# Altium PCB MotionBoard.PcbDoc
Units mil, origin at the board's own origin, x right, y up, seen from the top; angles counter-clockwise.
Board outline 6000 x 4000 mil, 2 copper layers (Top Layer, Bottom Layer); 37 components, 26 nets, 129 pads, 0 vias.
Unrouted connection lines stored in the file: 88.
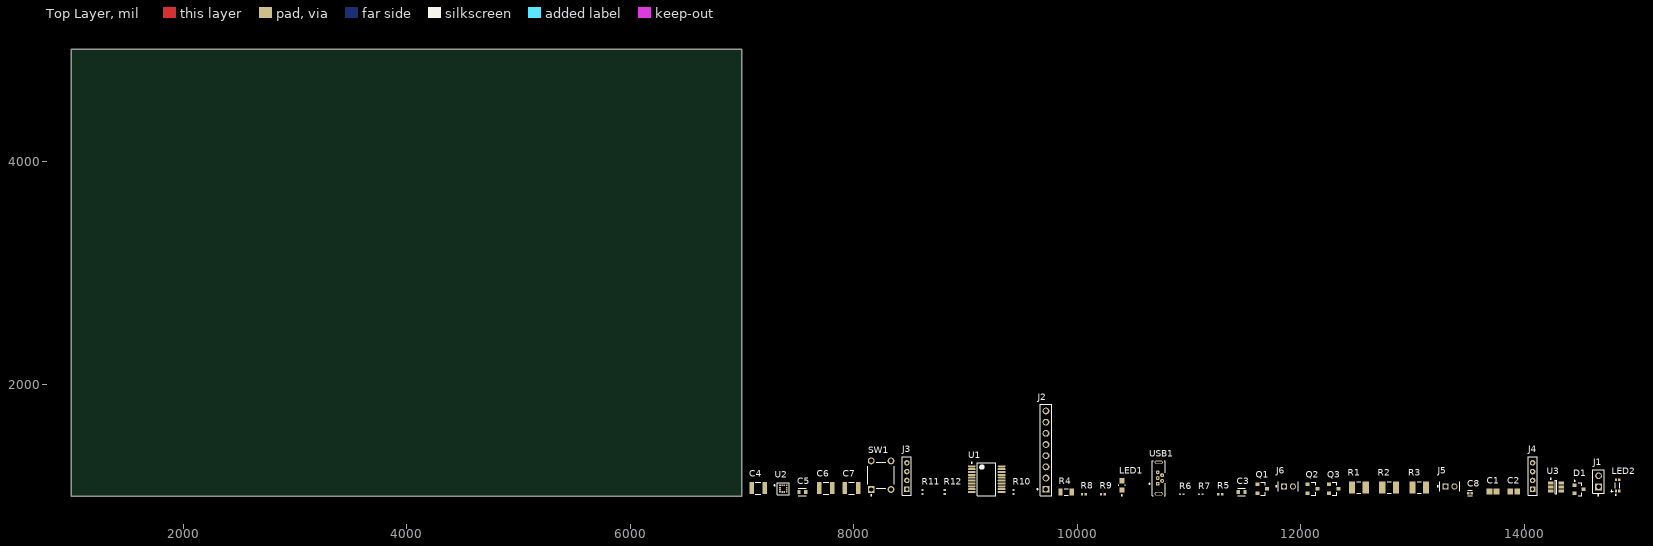
[diagram p0: Top Layer view]
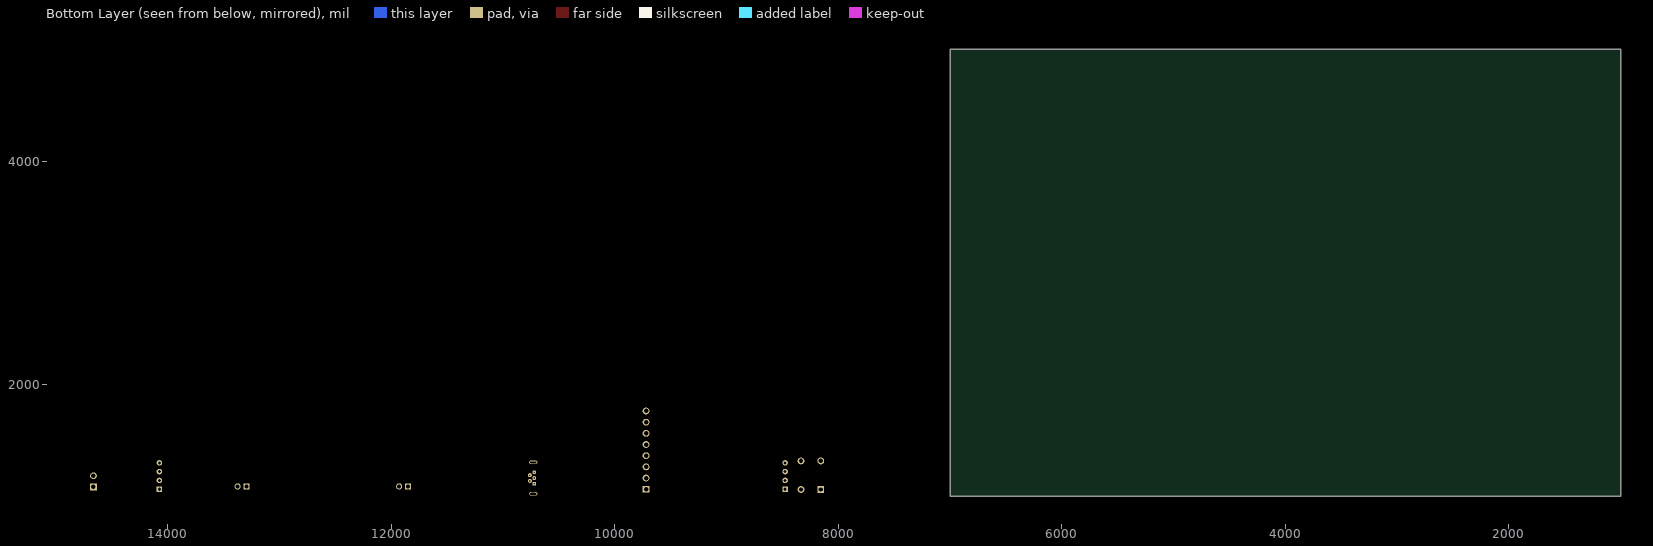
[diagram p1: Bottom Layer view, seen from below]

## Layer stack, top to bottom
Top Solder: solder mask 0.4, Solder Resist, Dk 3.5
Top Layer: signal copper 1.4
Dielectric 1: dielectric 12.6, FR-4, Dk 4.8
Bottom Layer: signal copper 1.4
Bottom Solder: solder mask 0.4, Solder Resist, Dk 3.5

## Board outline
1000,1000 7000,1000 7000,5000 1000,5000

## Design rules (kind name [scope] priority, off if disabled: settings)
Clearance [All] p1: gap=10 ignorepadtopadclearanceinfootprint=FALSE
PolygonConnect [All] p1: connectstyle=Relief reliefconductorwidth=10 reliefentries=4 polygonreliefangle="90 Angle" airgapwidth=10
RoutingVias [All] p1: holewidth=28 width=50 viastyle="Through Hole" minholewidth=28 minwidth=50 maxholewidth=28 maxwidth=50
SolderMaskExpansion [All] p1: expansion=4 istentingtop=FALSE
SupplyNets "Schematic Supply Nets_4" [InNet('+3V3')] p1: voltage=0.000
SupplyNets "Schematic Supply Nets_3" [InNet('GND')] p2: voltage=0.000
SupplyNets "Schematic Supply Nets_2" [InNet('+5V_USB')] p3: voltage=0.000
SupplyNets "Schematic Supply Nets_1" [InNet('VIN')] p4: voltage=0.000
SupplyNets "Schematic Supply Nets" [InNet('+VBAT')] p5: voltage=0.000
Width [All] p1: maxlimit=10 minlimit=10 preferedwidth=10
30 further rules are at their usual default settings.

## Components (designator, comment, footprint, x,y, rotation, side; value= is the part's Value field where it differs from the comment)
C1 "1u" CAPC2013X140X50NL20T25 13720,1045 r0 top
C2 "1u" CAPC2013X140X50NL20T25 13905,1045 r0 top
C3 "10u" FP-GRM188-0_2-MFG 11470,1040 r0 top
C4 "100n" FP-AC1210-0_85-MFG 7145,1075 r0 top value="100 nF"
C5 "10u" FP-GRM188-0_2-MFG 7540,1040 r0 top
C6 "100n" FP-AC1210-0_85-MFG 7750,1075 r0 top value="100 nF"
C7 "100n" FP-AC1210-0_85-MFG 7980,1075 r0 top value="100 nF"
C8 "470p" FP-C0402-BB-MFG 13515,1030 r0 top value="470 pF"
D1 "SBAT54CLT1G" ONSC-SOT-23-3-318-08_V 14490,1065 r0 top
J1 "TLW-102-07-G-S-230" FP-MTLW-102-07-G-S-230-MFG 14665,1135 r90 top
J2 "PPPC081LFBN-RC" SLIN-PPPC081LFBN-RC_V 9720,1415 r90 top
J3 "MMS-104-01-L-SV" SMTC-MMS-104-01-X-SV 8475,1065 r90 top
J4 "MMS-104-01-L-SV" SMTC-MMS-104-01-X-SV 14075,1065 r90 top
J5 "TMM-102-03-L-S" FP-TMM-102-03-L-S-MFG 13335,1090 r0 top
J6 "TMM-102-03-L-S" FP-TMM-102-03-L-S-MFG 11890,1090 r0 top
LED1 "G_LED 0805" FP-LG_R971-MFG 10400,1100 r90 top
LED2 "OVSRRGBCC3TM" FP-OVSRRGBCC3TM-MFG 14835,1100 r0 top
Q1 "2N7002" FP-PG-SOT23-3-MFG 11655,1070 r0 top
Q2 "2N7002" FP-PG-SOT23-3-MFG 12105,1070 r0 top
Q3 "2N7002" FP-PG-SOT23-3-MFG 12295,1070 r0 top
R1 "200" RESC3225X60X45ML20T20 12520,1080 r0 top
R2 "200" RESC3225X60X45ML20T20 12790,1080 r0 top
R3 "200" RESC3225X60X45ML20T20 13060,1080 r0 top
R4 "0 Ohm" RESC3116X65X45LL15T20 9900,1040 r0 top
R5 "10k" RESC1005X40X20NL05T10 11280,1020 r0 top
R6 "5.1k" RESC1005X35X20LL05T10 10935,1020 r0 top
R7 "5.1k" RESC1005X35X20LL05T10 11105,1020 r0 top
R8 "10k" RESC1005X40X20NL05T10 10060,1020 r0 top
R9 "10k" RESC1005X40X20NL05T10 10230,1020 r0 top
R10 "10k" RESC1005X40X20NL05T10 9430,1040 r90 top
R11 "10k" RESC1005X40X20NL05T10 8615,1040 r90 top
R12 "10k" RESC1005X40X20NL05T10 8815,1040 r90 top
SW1 "MJTP1230A" FP-MJTP1230A-MFG 8245,1190 r90 top
U1 "PIC16LF1829-I/SS" MCHP-SSOP-SS20_L 9190,1155 r0 top
U2 "IIS2DHTR" FP-LGA-12-8365767-MFG 7370,1070 r0 top
U3 "TC1073-3.3VCH713" SOT-23-CH6_M 14285,1085 r0 top
USB1 "USB3105-30-A" GCT-USB3105-30-A_V 10740,1165 r90 top

## Footprints (in the part's own frame and the unit in brackets; to place one, negate y for a bottom-side part, rotate by r counter-clockwise, add the part's x,y. Pads: shape width x height; smd on the part's side, far side on the other; paste and mask are expansions set on the pad)
CAPC2013X140X50NL20T25 [mm] "Chip Capacitor, 2-Leads, Body 2.00x1.25mm, IPC Medium Density"
  rect 1.3x1.45 smd: 1(-0.8,0) 2(0.8,0)
  body extent -1.1,-0.72 1.1,0.72, height 1.4
FP-AC1210-0_85-MFG [mm]
  rect 1x2.7 smd paste+0 mask+0: 1(-1.5,0) 2(1.5,0)
  silkscreen extent -0.63,-1.35 0.63,1.35, body extent -2.2,-1.7 2.2,1.7, height 0.25
FP-C0402-BB-MFG [mm]
  rect 0.52x0.52 smd paste+0 mask+0: 1(-0.4,0) 2(0.4,0)
  silkscreen extent -0.5,-0.64 0.5,0.64, body extent -0.8,-0.4 0.8,0.4, height 0.25
FP-GRM188-0_2-MFG [mm]
  rect 0.75x0.9 smd paste+0 mask+0: 1(-0.775,0) 2(0.775,0)
  silkscreen extent -0.9,-0.9 0.9,0.9, body extent -1.25,-0.6 1.25,0.6, height 0.25
FP-LG_R971-MFG [mm]
  rect 1.2x1.2 smd paste+0 mask+0: 1(-1.05,0) 2(1.05,0)
  silkscreen extent -2.4,-0.7 0.08,0.7, body extent -1.75,-0.8 1.75,0.8, height 0.25
FP-LGA-12-8365767-MFG [mm]
  rect 0.375x0.35 smd paste+0 mask+0: 1(-0.763,0.75) 2(-0.763,0.25) 3(-0.763,-0.25) 4(-0.763,-0.75) 7(0.763,-0.75) 8(0.763,-0.25) 9(0.763,0.25) 10(0.763,0.75)
  rect 0.35x0.375 smd paste+0 mask+0: 5(-0.25,-0.763) 6(0.25,-0.763) 11(0.25,0.763) 12(-0.25,0.763)
  silkscreen extent -2.12,-1.38 1.38,1.38, body extent -1.58,-1.58 1.58,1.58, height 0.25
FP-MJTP1230A-MFG [mm]
  rect 1.55x1.55 hole 1 paste-2539.97 mask+0: 1(-3.25,2.25)
  round 1.55 hole 1 paste-2539.97 mask+0: 2(3.25,2.25) 3(-3.25,-2.25) 4(3.25,-2.25)
  silkscreen extent -4.7,-3 3,3, body extent -4.13,-3.13 4.13,3.13, height 0.25
FP-MTLW-102-07-G-S-230-MFG [mm]
  rect 1.52x1.52 hole 1.02 paste-2539.97 mask+0: 1(-1.27,0)
  round 1.52 hole 1.02 paste-2539.97 mask+0: 2(1.27,0)
  silkscreen extent -3.27,-1.31 2.67,1.31, body extent -2.77,-1.41 2.77,1.41, height 0.25
FP-OVSRRGBCC3TM-MFG [mm]
  rect 0.5x0.6 smd paste+0 mask+0: 1(0.375,-1.3) 2(0.375,1.3) 3(-0.375,1.3) 4(-0.375,-1.3)
  silkscreen extent -1.53,-2.3 0.5,0.63, body extent -0.72,-1.7 0.72,1.7, height 0.25
FP-PG-SOT23-3-MFG [mm]
  rect 0.9x0.8 smd paste+0 mask+0: 1(-1.1,1) 2(-1.1,-1) 3(1.1,0)
  silkscreen extent -0.28,-1.5 0.7,1.5, body extent -1.65,-1.6 1.65,1.6, height 0.25
FP-TMM-102-03-L-S-MFG [mm]
  rect 1.39x1.39 hole 0.89 paste-2539.97 mask+0: 1(-1,0)
  round 1.39 hole 0.89 paste-2539.97 mask+0: 2(1,0)
  silkscreen extent -2.9,-1.05 2.27,1.05, body extent -2.1,-2.07 2.1,2.07, height 0.25
GCT-USB3105-30-A_V [mm] "THD, 5-Leads, Body 7.96x2.9mm, Pitch 0.65mm"
  rect 0.9x0.9 hole 0.4: 1(-1.3,0.5)
  round 0.9 hole 0.4: 2(-0.65,-0.5) 3(0,0.5) 4(0.65,-0.5) 5(1.3,0.5)
  oval 0.85x1.85 hole 0.35 slot 1.35 at 90 deg: 6(-3.575,0.28) 7(3.575,0.28)
  silkscreen extent -3.98,-1.17 3.98,2.5, body extent -3.98,-1.18 3.98,1.75, height 5.61
MCHP-SSOP-SS20_L [mm] "SOP, 20-Leads, Body 7.2x5.3mm, Pitch 0.65mm, IPC High Density"
  oval 1.8x0.45 smd: 1(-3.4,2.925) 2(-3.4,2.275) 3(-3.4,1.625) 4(-3.4,0.975) 5(-3.4,0.325) 6(-3.4,-0.325) 7(-3.4,-0.975) 8(-3.4,-1.625) 9(-3.4,-2.275) 10(-3.4,-2.925) 11(3.4,-2.925) 12(3.4,-2.275) 13(3.4,-1.625) 14(3.4,-0.975) 15(3.4,-0.325) 16(3.4,0.325) 17(3.4,0.975) 18(3.4,1.625) 19(3.4,2.275) 20(3.4,2.925)
  silkscreen extent -3.52,-3.75 2.1,3.82, body extent -2.8,-3.75 2.8,3.75, height 2
ONSC-SOT-23-3-318-08_V [mm] "SOT23, 3-Leads, Body 2.92x1.3mm, Pitch 0.95mm"
  rect 0.9x0.8 smd: 1(-1,0.95) 2(-1,-0.95) 3(1,0)
  silkscreen extent -1.12,-1.46 0.65,2.02, body extent -0.65,-1.46 0.65,1.46, height 1.11
RESC1005X35X20LL05T10 [mm] "Chip Resistor, 2-Leads, Body 1.00x0.50mm, IPC High Density"
  rect 0.45x0.45 smd: 1(-0.4,0) 2(0.4,0)
  body extent -0.53,-0.27 0.53,0.28, height 0.35
RESC1005X40X20NL05T10 [mm] "Chip Resistor, 2-Leads, Body 1.00x0.50mm, IPC Medium Density"
  rect 0.55x0.55 smd: 1(-0.45,0) 2(0.45,0)
  body extent -0.53,-0.27 0.53,0.28, height 0.4
RESC3116X65X45LL15T20 [mm] "Chip Resistor, 2-Leads, Body 3.25x1.7mm, IPC High Density"
  rect 0.95x1.6 smd: 1(-1.3,0) 2(1.3,0)
  silkscreen extent -0.45,-0.7 0.45,0.7, body extent -1.63,-0.85 1.63,0.85, height 0.65
RESC3225X60X45ML20T20 [mm] "Chip Resistor, 2-Leads, Body 3.20x2.50mm, IPC Low Density"
  rect 1.4x2.8 smd: 1(-1.55,0) 2(1.55,0)
  silkscreen extent -0.45,-1.3 0.45,1.3, body extent -1.7,-1.35 1.7,1.35, height 0.6
SLIN-PPPC081LFBN-RC_V [mm] "THD, 8-Leads, Body 20.82x2.54mm, Pitch 2.54mm"
  rect 1.55x1.55 hole 1.02: 1(-8.89,0)
  round 1.55 hole 1.02: 2(-6.35,0) 3(-3.81,0) 4(-1.27,0) 5(1.27,0) 6(3.81,0) 7(6.35,0) 8(8.89,0)
  silkscreen extent -10.41,-1.27 10.41,2.04, body extent -10.41,-1.27 10.41,1.27, height 8.5
SMTC-MMS-104-01-X-SV [mm] "Through Hole Box Connector Strip Assembly, 1x4 Pins, Vertical, 2mm Pitch, Female"
  rect 1.25x1.25 hole 0.711: 1(0,0)
  round 1.25 hole 0.711: 2(2,0) 3(4,0) 4(6,0)
  silkscreen extent -1.35,-1.03 7.34,1.03, body extent -1.28,-1 7.28,1, height 4.44
SOT-23-CH6_M [mm] "SOT23, 6-Leads, Body 2.9x1.7mm, Pitch 0.95mm, Lead Span 2.8mm, IPC Low Density"
  rect 1.3x0.7 smd: 1(-1.2,0.95) 2(-1.2,0) 3(-1.2,-0.95) 4(1.2,-0.95) 5(1.2,0) 6(1.2,0.95)
  silkscreen extent -1.32,-1.55 0.15,1.97, body extent -0.9,-1.55 0.9,1.55, height 1.45

## Part data
C1 C2: library part CMP-2007-03237-1, Manufacturer=Kemet, Part Number=C0805C105M4PACTU
C3 C5: library part CMP-06035-009669-1, "Chip Multilayer Ceramic Capacitors for General Purpose, 0603, 10uF, X5R, 15%, 20%, 16V / GRM188R61C106MA73J", Capacitance=10uF, Dielectric=X5R, Tolerance=20%, Voltage Rating (DC)=16V, Length=1.6mm, Thickness=800um, Width=800um
C4 C6 C7: library part CMP-03422-000642-1, "CAP CER 0.1UF 100V X7R 1210 / AC1210KKX7R0BB104", Capacitance="100 nF", Manufacturer=Yageo, Manufacturer Part Number=AC1210KKX7R0BB104, Package=AC1210-0.85, Temperature="-55°C to +125°C", Temperature Characteristic=X7R, Temperature Coefficient=15%, Temperature Range High=+125°C, Temperature Range Low=-55°C, Tolerance=0.1, Voltage Rating="100 V", Automotive=Yes, Automotive Grade="Grade 1", Category=Cap, ComponentLink2Description=Datasheet, ComponentLink2URL=http://www.yageo.com/documents/recent/UPY-AC_NP0X7R_16V-to-630V_12.pdf, Device Class L1="Passive Components", Device Class L2=Capacitors, Device Class L3="Ceramic Capacitors", Digikey Description="CAP CER 0.1UF 100V X7R 1210", Footprint Url=http://www.yageo.com/exep/pages/download/literatures/UPY-C_GEN_24.pdf, Height=0.95mm, Ipc Land Pattern Name=CAPC320250X85, Lead Free=Yes, Material=Ceramic, Octopart=https://octopart.com/ac1210kkx7r0bb104-yageo-78873719, RoHS=TRUE
C8: library part CMP-03020-005716-2, "C0402 470 pF C0G 10.00% 16 V", Capacitance="470 pF", Manufacturer=Kemet, Manufacturer Part Number=C0402C471K4GACAUTO, Package=C0402-BB, Temperature="-55°C to +125°C", Temperature Characteristic=C0G, Temperature Coefficient=15%, Temperature Range High=+125°C, Temperature Range Low=-55°C, Tolerance=0.1, Voltage Rating="16 V", Automotive=No, Category=Cap, ComponentLink2Description=Datasheet, ComponentLink2URL=https://content.kemet.com/datasheets/KEM_C1002_X7R_SMD.pdf, Device Class L1="Passive Components", Device Class L2=Capacitors, Device Class L3="Ceramic Capacitors", Height=0.55mm, Ipc Land Pattern Name=CAPC10050X50, Lead Free=Yes, Material=Ceramic, Octopart=https://octopart.com/c0402c471k4gacauto-kemet-48652786, RoHS=TRUE
D1: library part CMP-1055-00546-1, "Dual Common Cathode Schottky Barrier Diodes, 3-Pin SOT-23, Pb-Free, Tape and Reel", Manufacturer="On Semiconductor", ComponentLink1Description="Manufacturer URL", ComponentLink1URL=http://www.onsemi.com/, ComponentLink2Description=Datasheet, ComponentLink2URL=http://www.onsemi.cn/pub_link/Collateral/BAT54CLT1-D.PDF, ComponentLink3Description="Package Specification", ComponentLink3URL=http://www.onsemi.cn/pub_link/Collateral/318-08.PDF, Configuration="Common Cathode", DatasheetVersion="Rev. 8", IFSM Max (A)=0.6, Mounting Technology="Surface Mount", PackageDescription="3-Pin Small Outline Transistor, Body 2.92 x 1.3 mm, Pitch 0.95 mm", PackageReference=SOT-23-3-318-08, PackageVersion="Rev. AP, 11/2009", Packing="Tape and Reel", PartNumber=SBAT54CLT1G, RoHS=TRUE, trr Max (ns)=5
J1: library part CMP-02766-001053-1, "CONN HEADER VERT 2POS 2.54 / MMMTLW-102-07-G-S-230", Housing Color=Black, Max Current Rating=3A, Max Operating Temperature=125°C, Min Operating Temperature=-55°C, Contact Material=Bronze, Contact Plating=Gold, Depth=2.48mm, Gender=Male, Housing Material=Polymer, Length=5.08mm, Number of Contacts=2, Number of Rows=1, Orientation=Straight, Packaging=Bulk, Pitch=2.54mm, Radiation Hardening=No, Termination=Solder
J2: library part CMP-002-00028-2, "Female Header, Pitch 2.54 mm, 1 x 8 Position, Height 8.5 mm, Tail Length 3.2 mm, -40 to 105 degC, RoHS, Bulk", Manufacturer=Sullins, Max Operating Temperature=105°C, Min Operating Temperature=-40°C, Package Description="Female Header, Pitch 2.54 mm, 1 x 8 Position, Height 8.5 mm, Tail Length 3.2 mm", Case/Package=PPPC081LFBN-RC, Connector Type=Header, Datasheet URL=http://sullinscorp.com/catalogs/101_PAGE114-115_.100_FEMALE_HDR.pdf, Datasheet Version=Jan-15, Gender=Female, Mounting Technology=TH, Package Reference=PPPC081LFBN-RC, RoHS Compliant=Unknown
J3 J4: library part CMP-1022-00067-1, "Tiger Claw(TM) Socket Strip, Through-hole, Vertical, -55 to 125 degC, 2 mm Pitch, 4-Pin, Female, RoHS", Manufacturer=Samtec, Temperature Range="-55 to 125 degC", ComponentLink1Description="Manufacturer URL", ComponentLink1URL=http://www.samtec.com, ComponentLink2Description=Datasheet, ComponentLink2URL=http://www.samtec.com/documents/webfiles/pdf/MMS.PDF, ComponentLink3Description="Package Specification", ComponentLink3URL=http://www.samtec.com/documents/webfiles/cpdf/MMS-1XX-01-XXX-XX-XXX-MKT1.pdf, DatasheetVersion=F-214, Mounting Technology=Through-hole, Orientation=Vertical, PackageDescription="2mm Through Hole Box Connector Strip Assembly", PackageReference=MMS-104-01-X-SV, PackageVersion="AO, 2/1993", PartNumber=MMS-104-01-L-SV, Pitch="2 mm", RoHS=True
J5 J6: library part CMP-02766-001502-1, "CONN HEADER 2POS SNGL 2MM T/H", Color=Black, Max Current Rating=3.9A, Max Operating Temperature=125°C, Max Voltage Rating (AC)=500V, Min Operating Temperature=-55°C, Package Quantity=1, Connector Type=Header, Contact Finish - Mating=GOLD, Contact Material=Bronze, Contact Mating Length=0.157inch, Contact Plating=Gold, Contact Shape=Square, Contact Type="Male Pin", Depth=1.97mm, Fastening Type=Pull, Gender=Male, Housing Color=Black, Housing Material=Polymer, Insulation Color=Black, Insulation Material=Polymer, Lead Free="Lead Free", Length=4mm, Mount="Through Hole", Number of Contacts=2, Number of Positions=2, Number of Rows=1, Orientation=Straight, Packaging=Bulk, Pitch=2mm, Radiation Hardening=No, REACH SVHC="No SVHC", RoHS Compliant=Yes, Series=TMM, Termination=Solder
LED1: library part CMP-62016-000039-1, "LED GREEN DIFFUSED 0805 SMD / Q62702P5179", Case Code (Imperial)=0805, Case Code (Metric)=2012, Color=Green, Forward Current=25mA, Forward Voltage=2.2V, Lens Color=White, Max Operating Temperature=85°C, Min Operating Temperature=-30°C, Package Quantity=1, Power Dissipation=65mW, Reverse Voltage=12V, Test Current=20mA, Case/Package=0805, Depth=1.35mm, Dominant Wavelength=570nm, Height=0.9mm, Illumination Color=Green, Length=2.1mm, Lens Size=1.25mm, Lens Style=Diffused, Lens Transparency=Diffused, Luminous Flux=0.1lm, Luminous Intensity=45mcd, Mount="Surface Mount", Number of Elements=1, Number of LEDs=1, Number of Pins=2, Packaging="Tape and Reel", Radiation Hardening=No, Viewing Angle=160°, Width=1.25mm
LED2: library part CMP-70659-000001-1, "LED RGB DIFFUSED 1204 SMD", Case/Package=SMD/SMT, Color=Blue, Forward Voltage=3.3V, Lens Color=White, Test Current=20mA, Dominant Wavelength=475nm, Height=1.5mm, Lead Free="Lead Free", Length=3.2mm, Lens Style=Dome, Lens Transparency=Diffused, Luminous Intensity=200mcd, Mount="Surface Mount", Packaging="Cut Tape", REACH SVHC="No SVHC", RoHS Compliant=Yes, Series=-, Viewing Angle=150°, Width=1mm
Q1 Q2 Q3: library part CMP-32901-000180-1, "MOSFET N-CH 60V 0.3A SOT23 / 2N7002H6327XTSA2", Case/Package=SOT-23, Continuous Drain Current (ID)=300mA, Drain to Source Voltage (Vdss)=60V, Gate to Source Voltage (Vgs)=20V, Input Capacitance=20pF, Max Operating Temperature=150°C, Max Power Dissipation=500mW, Min Operating Temperature=-55°C, Halogen Free="Halogen Free", Lead Free="Lead Free", Max Dual Supply Voltage=60V, Mount="Surface Mount", Number of Pins=3, Packaging="Tape and Reel", Rds On Max=3R, Rise Time=3.3ns
R1 R2 R3: library part CMP-2005-00653-1, "CRCW1210200RJNTA", Manufacturer="Vishay Dale", Part Number=CRCW1210200RJNTA
R4: library part CMP-2000-07493-1, "Chip Resistor, 0 Ohm, +/- 0%, 0.25 W, -55 to 155 degC, 1206 (3216 Metric), RoHS, Tape and Reel / CRG1206ZR", Case Code (Imperial)=1206, Case Code (Metric)=3216, Manufacturer="TE Connectivity", Max Operating Temperature=125degC, Min Operating Temperature=-55degC, Number of Resistors=1, Package Description="2-Pin Chip Resistor, Body 3.1 x 1.55 mm", Package Quantity=5000, Package Reference=RESC3116X65X45L15T20, Power Rating=250mW, Resistance=0mOhm, Temperature Coefficient=100ppm\/degreesC, Tolerance=0%, Voltage Rating=200V, Case\/Package=1206, Composition=ThickFilm, Datasheet URL=http://www.te.com/commerce/DocumentDelivery/DDEController?Action=showdoc&DocId=Customer+Drawing%7F1623693%7FBA%7Fpdf%7FEnglish%7FENG_CD_1623693_BA.pdf%7F1623693-1, Datasheet Version="Rev. BA, 12/2009", Depth=1.55mm, ELV=Compliant, Height=0.55mm, Length=3.1mm, Manufacturer URL=http://www.te.com/, Mount=SurfaceMount, Mounting Technology=SurfaceMount, Number of Terminations=2, Packaging=TapeandReel, Radiation Hardening=No, RoHSCompliant=true, Termination=Solder, Weight=0.000571oz, Width=1.55mm
R5 R8 R9 R10 R11 R12: library part CMP-2002-01682-1, "TNPW040210K0DEED", Manufacturer="Vishay BCcomponents", Part Number=TNPW040210K0DEED
R6 R7: library part CMP-2002-03342-1, "CPF0402B5K1E1", Manufacturer="TE Connectivity / AMP", Part Number=CPF0402B5K1E1
SW1: library part CMP-47024-000004-1, "SWITCH TACTILE SPST-NO 0.05A 12V", Actuator Color=Black, Contact Resistance=100mR, Current Rating=50mA, Max Operating Temperature=70°C, Max Voltage Rating (DC)=12V, Min Operating Temperature=-20°C, Operating Force=160gf, Package Quantity=2000, Actuator Length=1.4mm, Actuator Material=Thermoplastic, Actuator Type=Standard, Color=Black, Contact Material=Bronze, Contact Plating=Silver, Electrical Life=100000Cycles, Illumination Type=Non-Illuminated, Mechanical Life=100000Cycles, Mount="Through Hole", Orientation=Straight, Packaging=Bulk, REACH SVHC="No SVHC", RoHS Compliant=Yes, Series=MJTP, Switch Function=Off-Mom, Switch Travel=0.25mm, Termination="PC Pin", Throw Configuration=SPST, Voltage Rating (DC)=12V
U1: library part CMP-0115-02781-1, "Flash Microcontroller with XLP Technology, 32 MHz, 17 I/O, -40 to 85 degC, 20-pin SSOP (SS20), Tube", Manufacturer=Microchip, Operation Voltage Range="1.8V - 3.6V", # of A/D Channels=12, ComponentLink1Description=Datasheet, ComponentLink1URL=http://ww1.microchip.com/downloads/en/DeviceDoc/41440C.pdf, ComponentLink2Description="Package Specification", ComponentLink2URL=http://www.microchip.com/stellent/groups/techpub_sg/documents/packagingspec/en012702.pdf, ComponentLink3Description="URL Link1", ComponentLink3URL="Product URL:http://www.microchip.com/wwwproducts/Devices.aspx?dDocName=en546919", DatasheetVersion="Rev. C", Digital Communication="1 -A/E/USART, 2 -MSSP(SPI/I2C)", EEPROM Data Memory (bytes)=256, I/O Pins=17, Internal Oscillator="32 MHz, 31 kHz", Max. CPU Speed MHz=32, Memory Type=Flash, Mounting Technology="Surface Mount", PackageDescription="20-Lead Plastic Shrink Small Outline, 5.3 x 7.2 mm Body, 0.65 mm Pitch", PackageReference=SSOP-SS20, PackageVersion="C04-072B, 12/2012", Packing=TUBE, PartNumber=PIC16LF1829-I/SS, Program Memory KBytes=14, Program Memory KWords=8, RAM=1024, Timers="4 - 8-bit, 1 - 16-bit, 0 - 32-bit"
U2: library part CMP-12175-000008-1, "ACCEL 2-16G I2C/SPI 12LGA", Manufacturer=STMicroelectronics, Max Supply Voltage=3.7V, Min Supply Voltage=1.71V, Operating Supply Current=2-11uA, Package=LGA-12-8365767, Temperature="-40°C to +85°C", Temperature Range High=+85°C, Temperature Range Low=-40°C, Accel Axis="X+Y and Z", Accel Range=2/4/8/16g, Automotive=No, Category=IC, ComponentLink2Description=Datasheet, ComponentLink2URL=https://www.st.com/content/ccc/resource/technical/document/datasheet/group1/35/6d/04/26/27/5c/4d/7c/DM00171283/files/DM00171283.pdf/jcr:content/translations/en.DM00171283.pdf, Device Class L1=Sensors, Device Class L2="Motion Sensors", Device Class L3=Accelerometers, Digikey Description="ACCEL 2-16G I2C/SPI 12LGA", Height=1mm, Lead Free=Yes, Manufacturer Part Number=IIS2DHTR, Octopart=https://octopart.com/iis2dhtr-stmicroelectronics-58218805, RoHS=TRUE, Sensor Output=I2C,SPI
U3: library part CMP-0136-00636-1, "50mA and 100mA CMOS LDOs with Shutdown, Active-Low Error Output and VREF Bypass, 6-Pin SOT-23, Extended Temperature, Tape and Reel", Code_IPC=SOT26A-6, DatasheetVersion="revD, Feb-2007", PackageDescription="6-Lead Plastic Small Outline Transistor (CH) [SOT-23]", PackageReference=SOT-23-CH6, PackageVersion="revBB, Aug-2009"
USB1: library part CMP-2000-07366-1, "USB 2.0 A/B Receptacle, 30 V, -55 to 85 degC, 5-Pin THD, RoHS, Tape and Reel", Manufacturer="Global Connector Technology", Package Description="5-Pin Through Hole Device, Body 7.96 x 2.9 mm, Pitch 0.65 mm", Connector Mounting=ThroughHoleMount, Contact Material=CopperAlloy, Contact Plating=GoldPlatedContacts, Datasheet URL=http://gct.co/usb-connectors/pdf/USB3105.pdf, Datasheet Version="Rev. F, 05/2015", Gender=Receptacle, Manufacturer URL=http://gct.co/, Mounting Technology=ThroughHole, No. of Positions=5Ways, Orientation=Vertical, Package Reference=USB3105-30-A, Product Range=-, USB Connector Type=MicroUSBTypeAB, USB Standard=USB2.0

## Nets (pads, with @x,y where several pads share a name; then routed paths per layer and width w, separated by ;. In a path a pad name is that pad's centre, name@x,y a point inside that pad or via, vN(x,y) a via of type N, cw(c..) or ccw(c..) an arc to the next point about the centre after c; other vN are vias at no path point)
+3V3: C2.2 C4.1 C5.1 C6.1 C7.1 J2.2 R10.2 R11.2 R12.2 U1.1 U2.9 U2.10 U3.6
+5V_USB: C3.1 D1.2 R5.2 R6.2 R7.2 USB1.1
+VBAT: D1.1 J1.1
BUTTON: J3.4 SW1.1 SW1.2 U1.10
GND: C1.1 C2.1 C3.2 C4.2 C5.2 C6.2 C7.2 C8.2 J1.2 J2.3 J3.3 LED1.1 Q1.2 Q2.2 Q3.2 R4.1 R8.1 R9.1 SW1.3 SW1.4 U1.20 U2.5 U2.6 U2.7 U2.8 U3.2 USB1.5 USB1.6 USB1.7
I2C1_SCL: J3.2 R12.1 U1.11 U2.1
I2C1_SDA: J3.1 R11.1 U1.13 U2.4
ICSPCLK: J2.5 U1.18
ICSPDAT: J2.4 U1.19
INT: U1.17 U2.12
LED_B: Q3.1 U1.7
LED_B_CON: J4.4 J6.2 LED2.3 R1.2
LED_G: Q2.1 U1.5
LED_G_CON: J4.3 J6.1 LED2.2 R2.2
LED_R: Q1.1 U1.8
LED_R_CON: J4.2 J5.2 LED2.1 R3.2
MCLR#/VPP: J2.1 R10.1 U1.4
NetC8_1: C8.1 U3.5
NetLED1_2: LED1.2 R5.1
NetQ1_3: Q1.3 R3.1
NetQ2_3: Q2.3 R2.1
NetQ3_3: Q3.3 R1.1
NetR4_2: R4.2 USB1.4
NetR6_1: R6.1 R8.2 USB1.3
NetR7_1: R7.1 R9.2 USB1.2
VIN: C1.2 D1.3 J4.1 J5.1 LED2.4 U3.1 U3.3
pads on no net: J2.6 J2.7 J2.8 U1.2 U1.3 U1.6 U1.9 U1.12 U1.14 U1.15 U1.16 U2.2 U2.3 U2.11 U3.4